# Altium PCB dsPIC Click v1.0.PcbDoc
Units mil, origin at the board's own origin, x right, y up, seen from the top; angles counter-clockwise.
Board outline 1500 x 2500 mil, 2 copper layers (Top Layer, Bottom Layer); 74 components, 48 nets, 196 pads, 12 vias.
Unrouted connection lines stored in the file: 79.
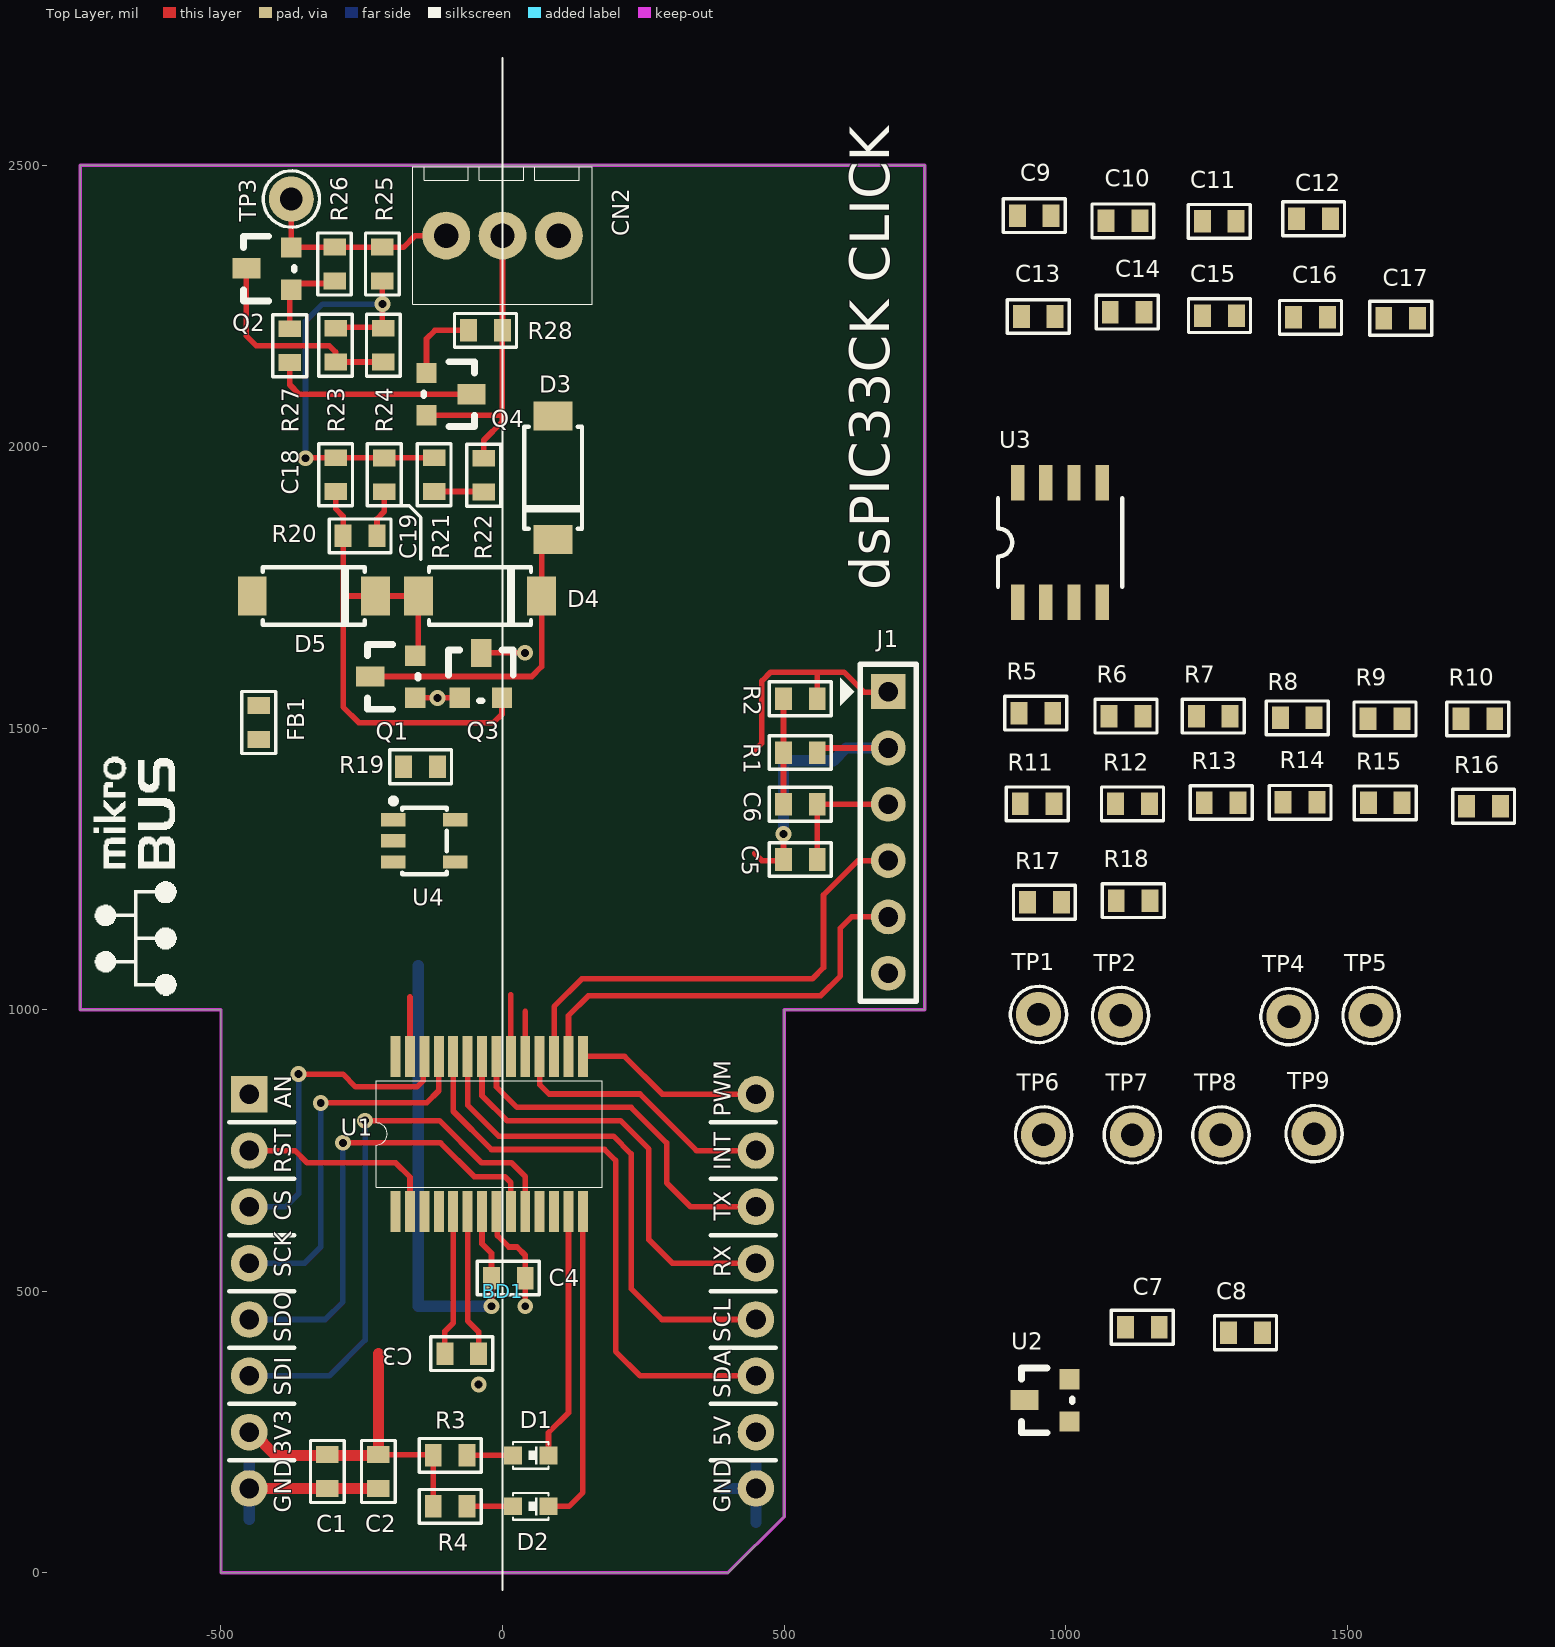
[diagram p0: Top Layer view]
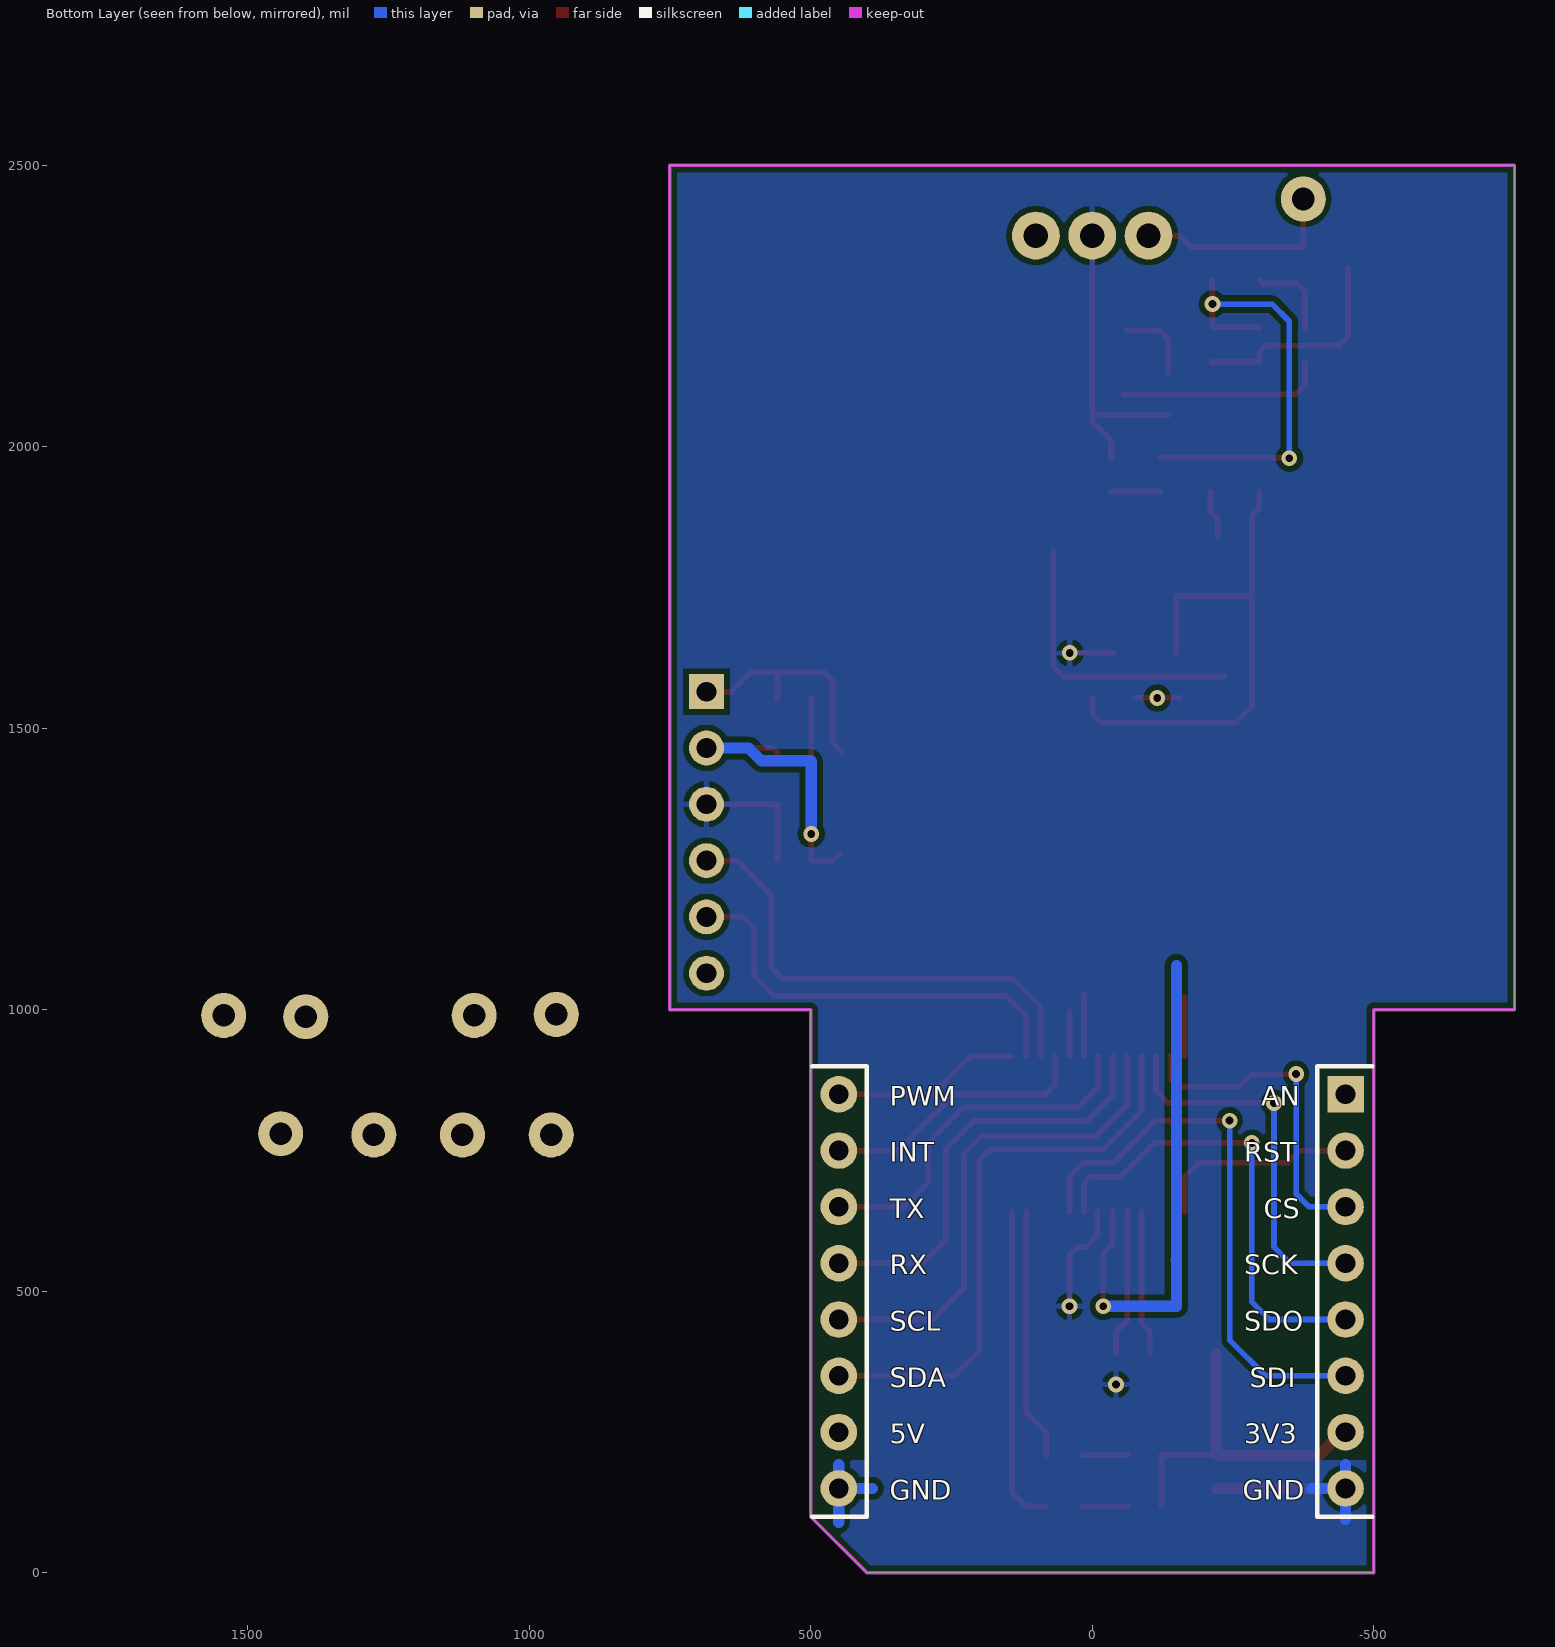
[diagram p1: Bottom Layer view, seen from below]

## Layer stack, top to bottom
Top Solder: solder mask 0.4, Solder Resist, Dk 3.5
Top Layer: signal copper 1.4
Dielectric 1: dielectric 12.6, FR-4, Dk 4.8
Bottom Layer: signal copper 1.4
Bottom Solder: solder mask 0.4, Solder Resist, Dk 3.5

## Board outline
-750,1000 -750,2500 750,2500 750,1000 500,1000 500,100 400,0 -500,0 -500,1000

## Design rules (kind name [scope] priority, off if disabled: settings)
Clearance [All] p1: gap=10
PolygonConnect [All] p1: connectstyle=Relief reliefconductorwidth=10 reliefentries=4 polygonreliefangle="90 Angle" airgapwidth=10
RoutingVias [All] p1: holewidth=28 width=50 viastyle="Through Hole" minholewidth=28 minwidth=50 maxholewidth=28 maxwidth=50
SolderMaskExpansion [All] p1: expansion=4
Width [All] p1: maxlimit=100 minlimit=8 preferedwidth=10 minimp=50.000000 maximp=50.000000 favimp=50.000000
30 further rules are at their usual default settings.

## Classes and differential pairs
component class "dsPIC Click Analog v1.0": C1 C2 C3 C4 C5 C6 C7 C8 C9 C10 C11 C12 C13 C14 C15 C16 C17 C18 C19 D1 D2 D3 D4 D5 FB1 J1 R1 R2 R3 R4 R5 R6 R7 R8 R9 R10 R11 R12 R13 R14 R15 R16 R17 R18 R19 R20 R21 R22 R23 R24 R25 R26 R27 R28 U1 U3

## Components (designator, comment, footprint, x,y, rotation, side; value= is the part's Value field where it differs from the comment)
BD1 "" MIKRO_BUS_dsPIC_T 0,0 r0 top locked
C1 "1uF" 0603 -309.42,149.58 r90 top
C2 "0.1uF" 0603 -222.07,210.42 r270 top
C3 "0.1uF" 0603 -41.94,390.95 r180 top
C4 "0.1uF" 0603 40.74,525.22 r180 top
C5 "0.1uF" 0603 498.59,1265.37 r0 top
C6 "0.1uF" 0603 498.59,1363.4 r0 top
C7 "0.1uF" 0603 1166.84,437.83 r180 top
C8 "1uF" 0603 1289.08,425 r0 top
C9 "0.1uF" 0603 974.79,2412.14 r180 top
C10 "0.1uF" 0603 1132.27,2402.66 r180 top
C11 "47pF" 0603 1242.5,2398.73 r0 top
C12 "0.1uF" 0603 1470.85,2406.6 r180 top
C13 "1000pF" 0603 981.85,2232.91 r180 top
C14 "680pF" 0603 1139.76,2240.79 r180 top
C15 "1uF" 0603 1242.93,2231.31 r0 top
C16 "0.015uF" 0603 1465.42,2231.31 r180 top
C17 "1500pF" 0603 1625.42,2229.72 r180 top
C18 "22uF" 0603 -294.8,1920 r90 top
C19 "0.1uF" 0603 -211.6,1980.42 r270 top
CN2 "1725669" 1725669 -100,2375 r0 top locked
D1 "LED Red" LTST-C190 50.2,208.66 r0 top
D2 "LED Green" LTST-C190 50.2,118.11 r0 top
D3 "SS14" SMA-FL 90,1945 r270 top
D4 "SS14" SMA-FL -40,1735 r0 top
D5 "SS14" SMA-FL -335.09,1735 r0 top
FB1 "FB" 0603 -434.67,1540.74 r270 top
J1 "ICSP" HDR1X6 685,1565 r270 top locked
Q1 "MMBT3904" SOT-23 -155,1555 r90 top
Q2 "PMV48XP" SOT-23 -375,2280 r90 top
Q3 "MMBT3906" SOT-23 -75,1554 r0 top
Q4 "2N7002" SOT-23 -135,2130 r270 top
R1 "10k" 0603 498.59,1455.33 r0 top
R2 "470R" 0603 559.44,1554 r180 top
R3 "330R" 0603 -62.61,210.26 r180 top
R4 "330R" 0603 -62.61,119.71 r180 top
R5 "10K" 0603 916.84,1525.43 r0 top
R6 "10K" 0603 1076.84,1520 r0 top
R7 "10K" 0603 1231.84,1520 r0 top
R8 "200K" 0603 1441.84,1520 r180 top
R9 "100K" 0603 1536.84,1515 r0 top
R10 "100K" 0603 1701.84,1515 r0 top
R11 "100K" 0603 919.13,1364.2 r0 top
R12 "1K" 0603 1088.42,1364.2 r0 top
R13 "1K" 0603 1245.9,1366.54 r0 top
R14 "4.99K" 0603 1446.84,1370 r180 top
R15 "10K" 0603 1537.27,1365.8 r0 top
R16 "1K" 0603 1711.84,1360 r0 top
R17 "10K" 0603 931.99,1189.46 r0 top
R18 "10K" 0603 1089.47,1192.24 r0 top
R19 "0R" 0603 -176,1430 r0 top
R20 "100K" 0603 -283.46,1840 r0 top
R21 "100K" 0603 -120,1920 r90 top
R22 "10K" 0603 -35,1980 r270 top
R23 "20R" 0603 -295,2150 r90 top
R24 "20R" 0603 -210,2150 r90 top
R25 "1K" 0603 -215,2355 r270 top
R26 "100K" 0603 -300,2355 r270 top
R27 "100K" 0603 -379.57,2210 r270 top
R28 "10K" 0603 -60.63,2205 r0 top
TP1 "Test Point" TP_KEYSTONE_5003 951.88,991.73 r90 top
TP2 "Test Point" TP_KEYSTONE_5003 1097.55,990 r90 top
TP3 "Test Point" TP_KEYSTONE_5003 -375,2440 r90 top
TP4 "Test Point" TP_KEYSTONE_5003 1396.76,987.8 r90 top
TP5 "Test Point" TP_KEYSTONE_5003 1542.43,990 r90 top
TP6 "Test Point Red" TP_KEYSTONE_5003 960.78,777.8 r90 top
TP7 "Test Point" TP_KEYSTONE_5003 1118.46,777.8 r90 top
TP8 "Test Point" TP_KEYSTONE_5003 1275.94,777.8 r90 top
TP9 "Test Point" TP_KEYSTONE_5003 1441.29,780 r90 top
U1 "dsPIC33CK256MC502" SSOP-28 -23.62,779.53 r0 top
U2 "MCP1754ST-3.3v" SOT-23 1006.84,270 r90 top
U3 "MCP6002" SOIC-8 990,1830 r90 top
U4 "MCP6001" TSOP-5 -138.78,1300 r270 top
? "MikroBusLogo" MB_Large -650,1045 r90 top locked

## Footprints (in the part's own frame and the unit in brackets; to place one, negate y for a bottom-side part, rotate by r counter-clockwise, add the part's x,y. Pads: shape width x height; smd on the part's side, far side on the other; paste and mask are expansions set on the pad)
0603 [mil]
  rect 30x40 smd: 1(0.42,1.6) 2(60.42,1.6)
  silkscreen extent -25,-28 85,32
1725669 [mil] "Connector; Terminal; 3 Position, 2.45mm"
  round 85 hole 43.31: 1(0,0) 2(100,0) 3(200,0)
  silkscreen extent -59,-122 259,122
HDR1X6 [mil]
  rect 62x62 hole 35: 1(0,0)
  round 62 hole 35: 2(100,0) 3(200,0) 4(300,0) 5(400,0) 6(500,0)
  silkscreen extent -49,-85 550,50
LTST-C190 [mm]
  rect 0.8x0.8 smd: 1(-0.8,0) 2(0.8,0)
  silkscreen extent -0.8,-0.6 0.8,0.6
MB_Large [mil]
  silkscreen extent -20,-71 404,76
MIKRO_BUS_dsPIC_T [mil]
  rect 65x65 hole 35: 1(-450,850)
  round 65 hole 35: 2(-450,750) 3(-450,650) 4(-450,550) 5(-450,450) 6(-450,350) 7(-450,250) 8(-450,150) 9(450,150) 10(450,250) 11(450,350) 12(450,450) 13(450,550) 14(450,650) 15(450,750) 16(450,850)
  silkscreen extent -485,-20 485,2520, body extent -508,100 507,900, height 82
SMA-FL [mm]
  rect 1.3x1.76 smd: 1(-2.78,0) 2(2.78,0)
  silkscreen extent -2.3,-1.3 2.3,1.3
SOIC-8 [mm]
  rect 1.6x0.6 smd: 1(-2.7,1.905) 2(-2.7,0.635) 3(-2.7,-0.635) 4(-2.7,-1.905) 5(2.7,-1.905) 6(2.7,-0.635) 7(2.7,0.635) 8(2.7,1.905)
  silkscreen extent -2,-2.81 2,2.8
SOT-23 [mil]
  rect 36x36 smd: 1(-1,0) 2(74,0)
  rect 36x50 smd: 3(37,80)
  silkscreen extent -21,-5 94,85
SSOP-28 [mm]
  rect 0.45x1.85 smd mask+0.08: 1(-4.225,-3.5) 2(-3.575,-3.5) 3(-2.925,-3.5) 4(-2.275,-3.5) 5(-1.625,-3.5) 6(-0.975,-3.5) 7(-0.325,-3.5) 8(0.325,-3.5) 9(0.975,-3.5) 10(1.625,-3.5) 11(2.275,-3.5) 12(2.925,-3.5) 13(3.575,-3.5) 14(4.225,-3.5) 15(4.225,3.5) 16(3.575,3.5) 17(2.925,3.5) 18(2.275,3.5) 19(1.625,3.5) 20(0.975,3.5) 21(0.325,3.5) 22(-0.325,3.5) 23(-0.975,3.5) 24(-1.625,3.5) 25(-2.275,3.5) 26(-2.925,3.5) 27(-3.575,3.5) 28(-4.225,3.5)
  silkscreen extent -5.1,-2.4 5.1,2.4
TP_KEYSTONE_5003 [mil]
  round 80 hole 40: 1(0,0)
  silkscreen extent -50,-50 50,50
TSOP-5 [mm] "Small Outline; 6 Leads (1 Absent); Body Width 4.4 mm; Pitch 1.27 mm"
  rect 0.6x1.1 smd: 1(-0.95,-1.4) 2(0,-1.4) 3(0.95,-1.4) 4(0.95,1.4) 5(-0.95,1.4)
  silkscreen extent -1.92,-1.52 1.5,1

## Part data
C1 C2 C3 C4 C5 C6: library part "Capacitor NP", "Capacitor"
C7 C8 C9 C10 C11 C12 C13 C14 C15 C16 C17 C18 C19: library part CAP, "Capacitor"
CN2: "Terminal Block, 3-Position"
D1: library part LED_RED, "Red LED"
D2: library part LED_GRN, "Green LED"
D3 D4 D5: "Diode, Schottky"
FB1: "Ferrite Bead"
J1: library part "Header 6", "Header, 6-Pin"
Q1: "Transistor, NPN"
Q2: "MOSFET, P-Channel"
Q3: "Transistor, PNP"
Q4: "MOSFET"
R1 R2 R3 R4 R5 R6 R7 R8 R9 R10 R11 R12 R13 R14 R15 R16 R17 R18 R19 R20 R21 R22 R23 R24 R25 R26 R27 R28: library part Res1, "Resistor"
TP1 TP2 TP3 TP4 TP5 TP6 TP7 TP8 TP9: "Test Point, 5003"
U1: "16-bit MCU"
U2: "LDO"
U3: "OPAMP, Dual"
U4: "OPAMP, Single"
?: "Logo"

## Via types
v1: diameter 28, hole 14, Top Layer to Bottom Layer, 12 vias

## Nets (pads, with @x,y where several pads share a name; then routed paths per layer and width w, separated by ;. In a path a pad name is that pad's centre, name@x,y a point inside that pad or via, vN(x,y) a via of type N, cw(c..) or ccw(c..) an arc to the next point about the centre after c; other vN are vias at no path point)
+3.3: C1.2 C2.1 C4.2 C5.1 J1.2 R1.2 R3.2 R4.2 U1.7 U1.20 | length 2193.1
  Top Layer w10: C2.1 -123.03,210 R3.2 R4.2 ; U1.7 -36.42,584.45 -19.69,567.72 C4.2 v1(-19.69,473.43) ; U1.20 14.76,1026.57 ; 447.8,1277.8 460.59,1265 497.05,1265 C5.1 v1(499.02,1312.24) ; R1.2 567.09,1465 J1.2
  Top Layer w20: -450,250 -444.29,250 -402.95,208.66 -221.81,208.66 C2.1 -220.47,389.36
  Bottom Layer w20: -149.61,1078.74 -149.61,555.12 ; -149.06,555.67 -149.61,555.12 ; v1(-19.69,473.43) -149.61,473.43 -149.61,555.12 ; v1(499.02,1312.24) 499.02,1441.22 499.96,1442.17 587.36,1442.17 610.2,1465 J1.2
+3.3A: C3.2 C8.1 C9.1 R8.2 R10.2 R12.2 TP7.1 U1.5 U2.2 U3.8 | length 258.5
  Top Layer w10: C3.2 -102.36,429.13 -87.6,443.9 U1.5
+5: C7.1 C15.1 D3.1 TP6.1 U2.3 U4.5
AGND: C3.1 C8.2 C9.2 C10.2 C14.1 FB1.2 R7.1 R11.1 R13.1 U1.6 U3.4 | length 263
  Top Layer w10: U1.6@-63.74,643.46 U1.6 -62.01,447.83 -42.36,428.19 C3.1
BAT_DETECT: R21.1 R22.2 U1.4 | length 88.6
  Top Layer w10: R21.1 -34.25,1920.42 R22.2
BAT_SNS_ADC: C14.2 R15.1 TP1.1 U1.1
BAT_TH: CN2.3 U1.2 | length 366.2
  Top Layer w10: -450,750 -368.66,750 -347.01,728.35 -189.96,728.35 -164.37,702.76 U1.2
DAC_SINE: R16.1 TP4.1 U1.3
IRQ: U1.18 | length 482.8
  Top Layer w10: U1.18 65.94,867.13 82.68,850.39 244.09,850.39 344.49,750 450,750
LED_GRN: D2.2 U1.14 | length 570.2
  Top Layer w10: D2.2 118.11,118.11 142.72,142.72 U1.14
LED_RED: D1.2 U1.13 | length 447.7
  Top Layer w10: D1.2 81.69,249.02 117.13,284.45 U1.13
MCLR: J1.1 R2.1 U1.27 | length 532.4
  Top Layer w10: U1.27 -164.37,1022.64 ; 443.86,1456.93 460.59,1473.66 460.59,1583.9 476.34,1599.65 559.02,1599.65 ; R2.1 559.02,1599.65 ; J1.1 684.21,1564.21 641.69,1564.21 606.26,1599.65 559.02,1599.65
NetC6_1: C6.1 R1.1 R2.2 | length 187.4
  Top Layer w10: C6.1 R1.1 R2.2
NetC10_1: C10.1 R6.2 R7.2 R8.1 U3.3
NetC11_1: C11.1 R5.2 R9.2 U3.2
NetC11_2: C11.2 C12.1 R9.1 U3.1
NetC12_2: C12.2 R10.1 R11.2 U3.5
NetC13_1: C13.1 R12.1 R13.2 R14.2 U3.6
NetC13_2: C13.2 R14.1 R15.2 U3.7
NetC16_1: C16.1 R16.2 R17.1
NetC18_1: C18.1 D4.1 D5.2 Q1.2 Q3.2 R20.1 TP2.1 | length 951
  Top Layer w10: C18.1 -296.4,1890 -283.04,1876.64 R20.1 -283.04,1537.72 -255.31,1510 -16,1510 -1,1525 Q3.2 ; -283.04,1735 D5.2 D4.1 Q1.2@-149.45,1634.55
NetC18_2: C18.2 C19.1 R21.2 R23.2 R24.2 R25.2 | length 787.2
  Top Layer w10: v1@-350,1980.42 C18.2 R21.2 ; R23.2 -294.8,2212.23 -213.4,2212.23 v1(-213.4,2253.4) R25.2
  Bottom Layer w10: v1(-350,1979.58) -350,2222.83 -319.43,2253.4 v1(-213.4,2253.4)
NetC19_2: C19.2 R18.2 R20.2 | length 83.8
  Top Layer w10: R20.2 -223.04,1871.96 -210,1885 C19.2
NetD1_1: D1.1 R3.1 | length 81.7
  Top Layer w10: R3.1 D1.1
NetD2_1: D2.1 R4.1 | length 81.7
  Top Layer w10: R4.1 D2.1
NetD3_2: D3.2 D4.2 Q1.3 | length 517.2
  Top Layer w10: Q1.3 52,1592 69.45,1609.45 D4.2 D3.2@69.45,1815
NetQ1_1: Q1.1 Q3.1 R19.2 | length 79
  Top Layer w10: Q1.1 Q3.1
  other v1: -115.5,1554
NetQ2_1: Q2.1 R26.2 R27.1 | length 153.7
  Top Layer w10: R27.1 -377.97,2276.03 Q2.1 -364,2290 -302.98,2290 R26.2
NetQ2_3: Q2.3 R23.1 R24.1 | length 393.1
  Top Layer w10: Q2.3 -455,2196.93 -437.65,2179.58 -307.98,2179.58 -296.6,2168.2 R23.1 R24.1
NetQ4_3: Q4.3 R27.2 | length 369.6
  Top Layer w10: R27.2 -377.97,2110 -360.97,2093 Q4.3
NetR18_1: R18.1 U4.4
NetR19_1: R19.1 U4.1
PGC: J1.5 U1.16 | length 762.6
  Top Layer w10: U1.16 117.13,989.57 152.56,1025 565,1025 600,1060 600,1145 620,1165 J1.5
PGD: J1.4 U1.17 | length 864.9
  Top Layer w10: U1.17 91.54,1005.91 140.63,1055 550,1055 570,1075 570,1203.94 631.06,1265 J1.4
PWM: U1.15 | length 335.2
  Top Layer w10: U1.15 216.54,917.32 283.86,850 450,850
RST: U1.12
RXD: U1.22 | length 773.9
  Top Layer w10: U1.22 -36.42,847.44 7.87,803.15 209.61,803.15 259.84,752.91 259.84,591.73 301.57,550 450,550
SCL: U1.23 | length 896.4
  Top Layer w10: U1.23 -62.01,830.71 -6.89,775.59 196.85,775.59 228.35,744.09 228.35,504.92 283.27,450 450,450
SDA: U1.24 | length 1028.2
  Top Layer w10: U1.24 -87.6,819.88 -19.69,751.97 181.1,751.97 200.79,732.28 200.79,393.31 244.09,350 450,350
SINE_ADC: C17.1 R17.2 TP5.1 U1.28 U4.3
SNS+: CN2.1 Q2.2 R6.1 R25.1 R26.1 TP3.1 | length 369.7
  Top Layer w10: TP3.1 Q2.2 -176,2354 -155,2375 CN2.1
SNS-: C1.1 C2.2 C4.1 C5.2 C6.2 C7.2 C15.2 C16.2 C17.2 CN2.2 D5.1 FB1.1 J1.3 Q3.3 Q4.2 R5.1 R22.1 R28.2 TP8.1 TP9.1 U1.8 U1.19 U2.1 U4.2 | length 1510.1
  Top Layer w10: Q4.2 0,2056 ; Q3.3 v1(39.8,1634) ; R22.1 -33.4,2011.6 -0.2,2044.8 R28.2 ; U1.8 -9.09,640 -9.09,599.1 11.27,578.74 25.59,578.74 40.31,564.02 C4.1 v1(40.31,473.43) ; R28.2@0,2206.8 CN2.2 ; U1.19 40.35,997.05 ; C5.2 C6.2 J1.3
  Top Layer w20: -450,150 C1.1 C2.2
  Bottom Layer w20: -450,95 -450,150 ; -450,192.21 -450,150 ; -390,150 -450,150
  other v1: -42.36,334.65
SPI_CS: U1.26 | length 589.2
  Top Layer w10: v1(-362.2,885.83) -283.46,885.83 -260.83,863.19 -152.02,863.19 -140.51,874.69 -140.51,915.59 U1.26
  Bottom Layer w10: -450,650 -385.43,650 -362.2,673.23 v1(-362.2,885.83)
SPI_SCK: U1.25 | length 674.6
  Top Layer w10: v1(-322.83,834.65) -134.84,834.65 -113.19,856.3 U1.25
  Bottom Layer w10: -450,550 -351.57,550 -322.83,578.74 v1(-322.83,834.65)
SPI_SDI: U1.10 | length 1009.6
  Top Layer w10: v1(-244.09,803.15) -112.24,803.15 -37.44,728.35 15.75,728.35 40.35,703.74 U1.10
  Bottom Layer w10: -450,350 -307.48,350 -244.09,413.39 v1(-244.09,803.15)
SPI_SDO: U1.9 | length 840.7
  Top Layer w10: v1(-283.46,763.78) -110.24,763.78 -50.2,703.74 3.94,703.74 14.76,692.91 U1.9
  Bottom Layer w10: -450,450 -314.76,450 -283.46,481.3 v1(-283.46,763.78)
TEST_EN: Q4.1 R28.1 U1.11 | length 141.7
  Top Layer w10: Q4.1 -135,2191.8 -120.2,2206.6 R28.1
TXD: U1.21 | length 644.8
  Top Layer w10: U1.21 -10.83,863.19 25.59,826.77 228.35,826.77 291.34,763.78 291.34,692.91 334.25,650 450,650
pads on no net: BD1.1 BD1.2 BD1.3 BD1.4 BD1.5 BD1.6 BD1.7 BD1.8 BD1.9 BD1.10 BD1.11 BD1.12 BD1.13 BD1.14 BD1.15 BD1.16 J1.6
copper on no net: | length 162.2
  Bottom Layer w20: 390,150 450,150 ; 450,90 450,150 ; 450,192.21 450,150

## Polygon pours and split planes (outlines as drawn)
SNS- on Bottom Layer "SNS-_L02_P000" (solid, remove dead copper, pour order 0): -750,2500 750,2500 750,1000 500,1000 500,900 400,900 400,200 490,200 490,105 395,10 375,10 -490,10 -490,200 -395,200 -395,900 -500,900 -500,1000 -750,1000

## Keep-outs
Keep-Out Layer:
  the board outline again, w6

## Silkscreen, mask and mechanical layers (free items; w line width, h text height)
Top Overlay:
  lines w4: 0,-30 0,2690
  lines w6: -180,1895 -165.55,1895 -145,1874.45 -145,1800

## Text inside footprints (layer, text, board x,y; h text height)
BD1: Top Overlay "dsPIC33CK CLICK" at 710,1745 h120 r90; Top Overlay "GND" at -375,107 h30 r90; Top Overlay "3V3" at -375,210 h30 r90; Top Overlay "5V" at 405,225 h30 r90; Top Overlay "SDI" at -375,315 h30 r90; Top Overlay "AN" at -375,825 h30 r90; Top Overlay "SCK" at -375,525 h30 r90; Top Overlay "INT" at 405,715 h30 r90; Top Overlay "RST" at -375,710 h30 r90; Top Overlay "SDO" at -375,410 h30 r90; Top Overlay "GND" at 405,107 h30 r90; Top Overlay "SDA" at 405,310 h30 r90; Top Overlay "SCL" at 405,410 h30 r90; Top Overlay "RX" at 405,525 h30 r90; Top Overlay "TX" at 405,625 h30 r90; Top Overlay "CS" at -375,625 h30 r90; Top Overlay "PWM" at 405,810 h30 r90; Bottom Overlay "SCL" at 360,430 h35; Bottom Overlay "INT" at 360,730 h35; Bottom Overlay "SDI" at -280,330 h35; Bottom Overlay "CS" at -305,630 h35; Bottom Overlay "GND" at -267,130 h35; Bottom Overlay "3V3" at -270,230 h35; Bottom Overlay "SDO" at -270,430 h35; Bottom Overlay "SDA" at 360,330 h35; Bottom Overlay "RST" at -270,730 h35; Bottom Overlay "PWM" at 360,830 h35; Bottom Overlay "GND" at 360,130 h35; Bottom Overlay "5V" at 360,230 h35; Bottom Overlay "RX" at 360,530 h35; Bottom Overlay "TX" at 360,630 h35; Bottom Overlay "AN" at -300,830 h35; Bottom Overlay "SCK" at -270,530 h35